# EAGLE board untitled (EAGLE 6.5.0)
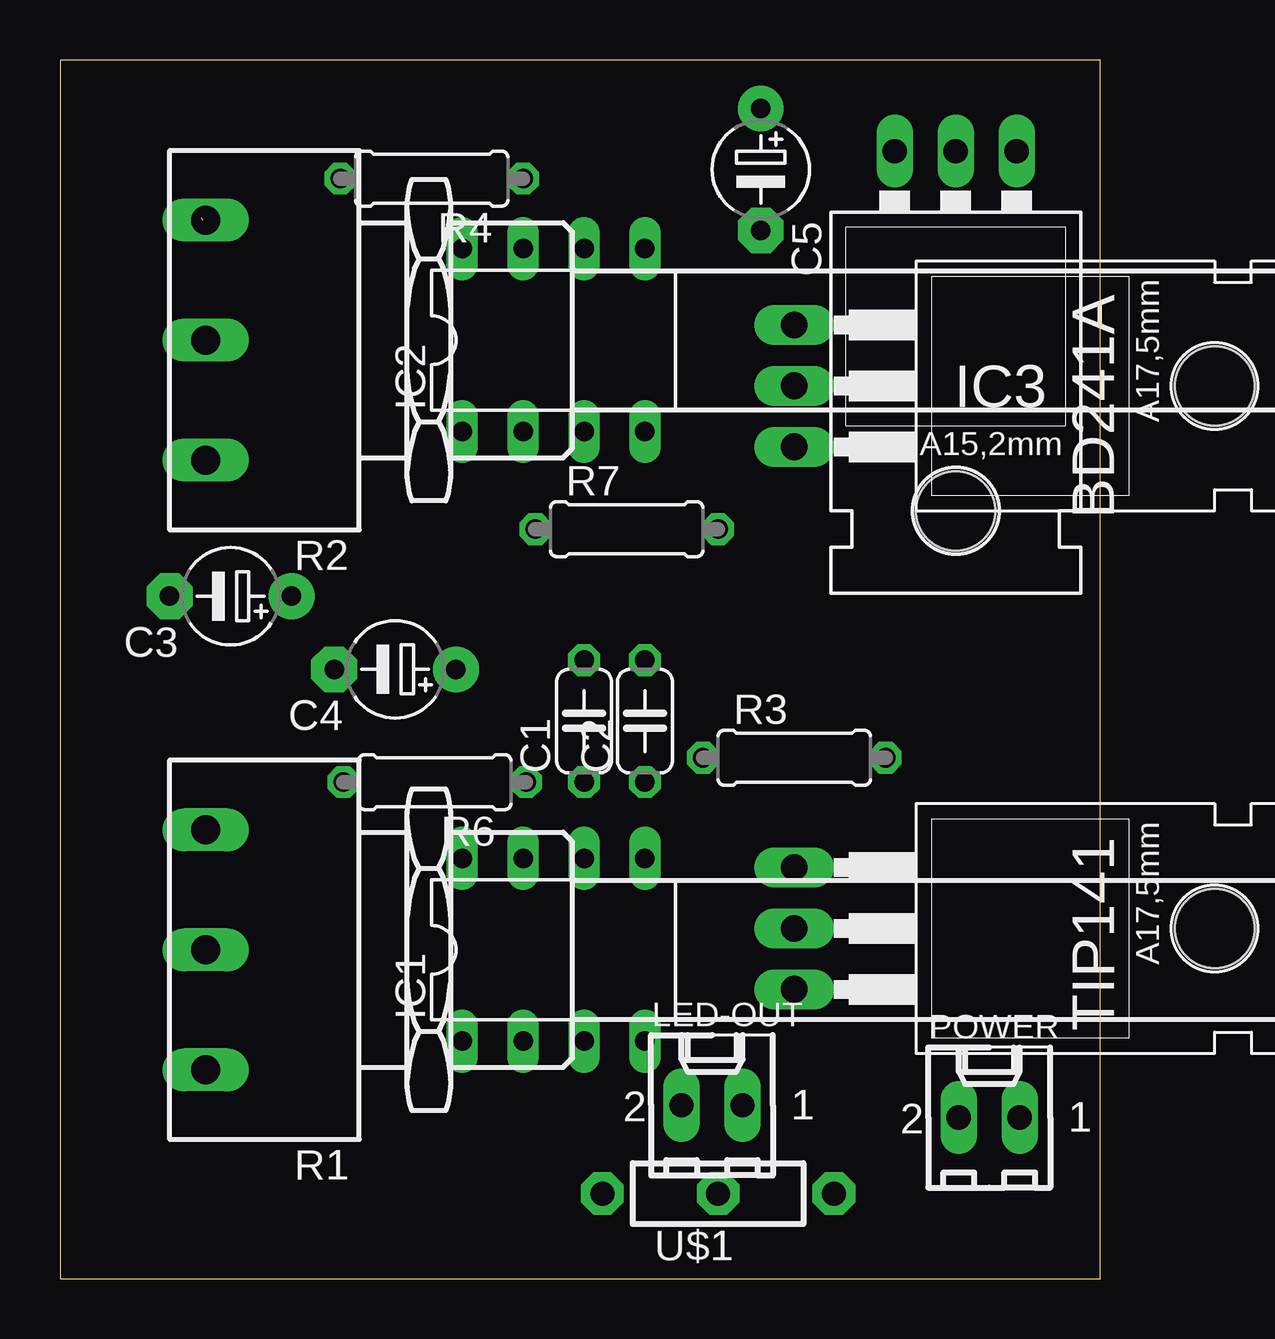
[diagram p0: board, top side]
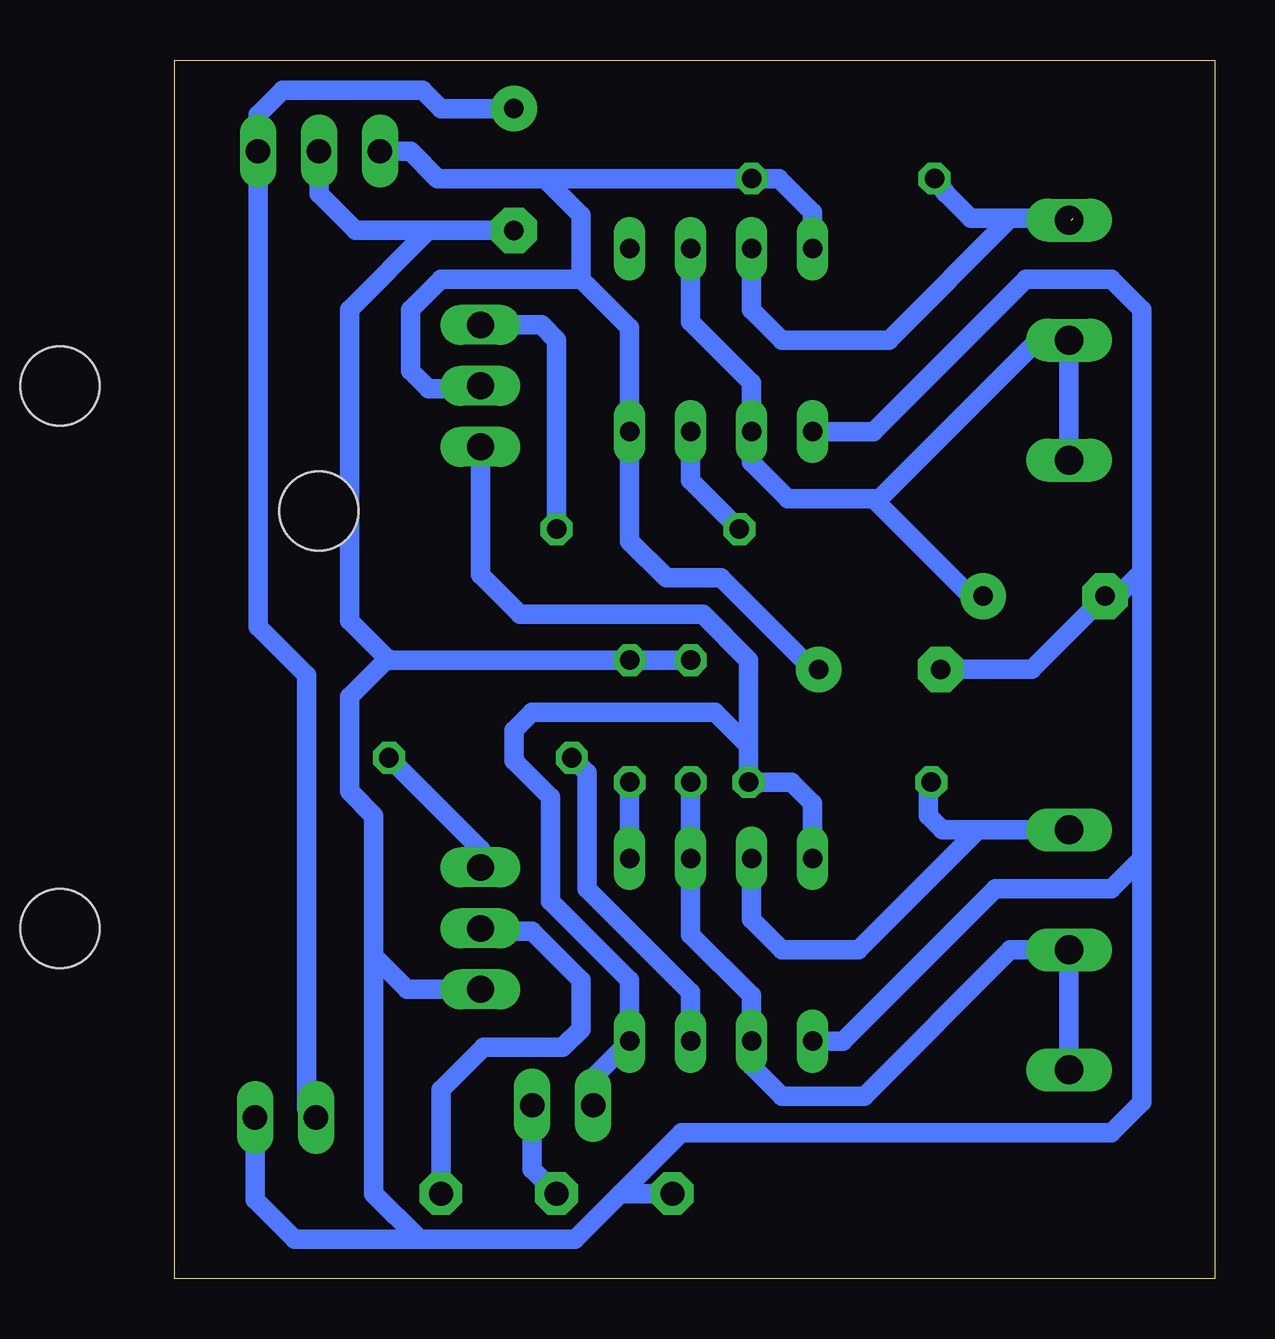
[diagram p1: board, bottom side, seen from below]

Size 43.36 x 50.79 mm. Coordinates in mm from the lower left corner, seen from the top.
Outline: 0,0 43.36,0 43.36,50.79 0,50.79 0,0
Copper layers (1*16): Top 0.035mm / dielectric 1.5mm / Bottom 0.035mm
Design rules "default": minimum track width 10mil, minimum drill 24mil, track to track 8mil, track to pad 8mil, pad to pad 8mil, via to via 8mil, smd to smd 8mil, copper to edge 40mil, drill to drill 8mil, minimum pad ring 10mil, minimum via ring 8mil, stop-mask expansion 4mil, vias tented up to drill 0mil, thermal gap 10mil

## Footprints (pad centres in the part's own frame; a part is rotated, then mirrored left to right if it is on the bottom)
TO220 = drill 1.118 long: 1 -2.54,-6.35; 2 0,-6.35; 3 2.54,-6.35 | hole 3.302: 0,11.176
C050-024X044 = drill 0.813 octagon: 1 -2.54,0; 2 2.54,0
E5-4 = drill 0.813 pad 1.905: + -2.54,0 | drill 0.813 pad 1.905 octagon: - 2.54,0
DIL-08 = drill 0.813 long: 1 -3.81,-3.81; 2 -1.27,-3.81; 3 1.27,-3.81; 4 3.81,-3.81; 5 3.81,3.81; 6 1.27,3.81; 7 -1.27,3.81; 8 -3.81,3.81
78XXL = drill 1.016 long: GND 0,-3.81; IN -2.54,-3.81; OUT 2.54,-3.81 | hole 3.302: 0,11.176
6410-02 = drill 1.016 long: 1 1.27,0; 2 -1.27,0
PC16S = drill 1.2 long: 1A -5,6.5; 1E 5,6.5; 1S 0,6.5
0207/7 = drill 0.813 octagon: 1 -3.81,0; 2 3.81,0
CON3 = drill 1 pad 1.778 octagon: P$1 -5.334,0.254; P$2 -0.508,0.254; P$3 4.318,0.254

## Placement (x,y rotation side)
BD241A  BD241A  [TO220]  36.96,37.21 270 top
C1  102  [C050-024X044]  21.84,23.24 90 top
C2  102  [C050-024X044]  24.38,23.24 90 top
C3  1uf  [E5-4]  7.11,28.45 180 top
C4  1uf  [E5-4]  13.97,25.4 180 top
C5  1uf  [E5-4]  29.21,46.23 270 top
IC1  NE555  [DIL-08]  20.57,13.72 0 top
IC2  NE555  [DIL-08]  20.57,39.12 0 top
IC3  [78XXL]  37.34,43.18 180 top
LED-OUT  22-27-2021-02  [6410-02]  27.18,7.24 0 top
POWER  22-27-2021-02  [6410-02]  38.73,6.73 0 top
R1  PC16S  [PC16S]  12.57,13.72 90 top
R2  PC16S  [PC16S]  12.57,39.12 90 top
R3  2.2K  [0207/7]  30.61,21.72 0 top
R4  10k  [0207/7]  15.49,45.85 180 top
R6  100k  [0207/7]  15.62,20.7 180 top
R7  100k  [0207/7]  23.62,31.24 0 top
TIP141  TIP141  [TO220]  36.96,14.61 270 top
U$1  -SLIDERS  [CON3]  27.94,3.3 0 top

## Library data of the parts
BD241A TIP141 = transistor-fet+irf7201
C1 C2 = rcl 2
C3-C5 R3 R4 R6 R7 = rcl-2
IC1 IC2 = st-microelectronics 2
IC3 U$1 = tango
LED-OUT POWER = con-molex 2
R1 R2 = piher 2

## Nets
+12V: BD241A.2 C4.+ IC2.4 IC2.8 IC3.OUT R4.1
GND: C1.2 C2.2 C3.- C4.- C5.- IC1.1 IC2.1 IC3.GND POWER.1 TIP141.3 U$1.P$1
N$1: IC1.7 R1.1E R6.2
N$2: LED-OUT.1 U$1.P$2
N$3: IC1.3 R3.1
N$4: C2.1 IC1.5
N$6: BD241A.1 R7.2
N$7: IC2.3 R7.1
N$8: R3.2 TIP141.1
N$9: C1.1 IC1.2 IC1.6 R1.1A R1.1S
N$10: C5.+ IC3.IN POWER.2
N$12: TIP141.2 U$1.P$3
N$13: C3.+ IC2.2 IC2.6 R2.1A R2.1S
N$14: IC2.7 R2.1E R4.2
VOUT: BD241A.3 IC1.4 IC1.8 LED-OUT.2 R6.1

## Tracks (layer width: path | path; a pad name or v marks a point on that pad's centre or on a via)
+12V
  Bottom 0.813: IC2.8 16.76,44.45 18.16,45.85 R4.1 27.94,45.85 | IC3.OUT 33.53,46.99 32.38,45.85 27.94,45.85 | 26.42,41.66 24.38,39.62 IC2.4 24.38,30.73 22.86,29.21 20.57,29.21 16.76,25.4 C4.+ | 26.42,41.66 26.42,44.32 27.94,45.85 | 26.42,41.66 32.26,41.66 33.53,40.39 33.53,37.85 32.77,37.08 30.23,37.08 BD241A.2
GND
  Bottom 0.813: IC1.1 15.49,9.91 9.14,16.26 4.32,16.26 3.05,17.53 | 3.05,29.46 3.05,40.39 4.32,41.66 7.87,41.66 14.22,35.31 IC2.1 | 3.05,29.46 3.05,17.53 | 34.54,25.78 C2.2 C1.2 | 33.15,1.65 38.35,1.65 40.01,3.3 POWER.1 | 33.15,1.65 35.05,3.56 35.05,13.46 | 34.54,25.78 36.07,24.26 36.07,20.32 35.05,19.3 35.05,13.46 | 3.05,17.53 3.05,7.37 4.32,6.1 22.23,6.1 24.77,3.56 | 33.15,1.65 26.67,1.65 24.77,3.56 | C5.- 32.77,43.69 | 32.77,43.69 35.81,43.69 37.34,45.21 IC3.GND | TIP141.3 33.66,12.06 35.05,13.46 | C4.- 7.62,25.4 C3.- 4.06,28.45 3.05,29.46 | U$1.P$1 24.77,3.56 | 34.54,25.78 34.54,25.91 36.07,27.43 36.07,40.39 32.77,43.69
N$1
  Bottom 0.813: IC1.7 19.3,14.99 18.03,13.72 14.86,13.72 9.86,18.72 R1.1E | R1.1E 6.52,18.72 6.86,18.8 6.73,18.8 | R1.1E 11.35,18.72 11.94,19.3 11.94,20.57 R6.2
N$2
  Bottom 0.813: LED-OUT.1 28.45,4.57 U$1.P$2
N$3
  Bottom 0.813: IC1.3 21.84,11.94 26.16,16.26 26.16,21.08 R3.1
N$4
  Bottom 0.813: IC1.5 C2.1
N$6
  Bottom 0.813: BD241A.1 28.07,39.75 27.43,39.12 R7.2
N$7
  Bottom 0.813: R7.1 21.84,33.27 IC2.3
N$8
  Bottom 0.813: TIP141.1 30.61,17.91 R3.2
N$9
  Bottom 0.813: C1.1 IC1.6 21.84,14.35 19.3,11.81 IC1.2 19.3,8.89 18.03,7.62 14.61,7.62 8.51,13.72 R1.1S R1.1A
N$10
  Bottom 0.813: C5.+ 32.26,48.77 33.02,49.53 38.86,49.53 39.88,48.51 IC3.IN 39.88,27.18 37.85,25.15 37.85,7.11 POWER.2
N$12
  Bottom 0.813: TIP141.2 29.97,14.48 28.45,14.48 26.42,12.45 26.42,10.41 27.18,9.65 30.48,9.65 32.26,7.87 U$1.P$3
N$13
  Bottom 0.813: 14.22,32.51 13.97,32.51 7.37,39.12 R2.1S R2.1A | 14.22,32.51 17.78,32.51 19.3,34.04 IC2.2 19.3,37.34 21.84,39.88 IC2.6 | C3.+ 10.16,28.45 14.22,32.51
N$14  (1 unrouted)
  Bottom 0.813: R2.1E 5.97,44.12 | IC2.7 19.3,40.39 18.03,39.12 13.59,39.12 8.51,44.2 | 8.51,44.2 5.9,44.2 | 8.51,44.2 10.16,44.2 11.18,45.21 R4.2
S$11  (1 unrouted)
VOUT
  Bottom 0.813: IC1.4 24.38,9.78 | 19.43,22.23 R6.1 17.65,20.7 16.76,19.81 IC1.8 | 19.43,22.23 20.83,23.62 28.45,23.62 29.21,22.86 29.21,21.59 27.69,20.07 27.69,15.75 24.38,12.45 IC1.4 | 19.43,22.23 19.43,25.78 21.34,27.69 28.96,27.69 30.61,29.34 BD241A.3 | LED-OUT.2 25.91,8.38 IC1.4